# Altium PCB pcb.PcbDoc (part 2 of 2)
Units mm, origin at the board's own origin, x right, y up, seen from the top; angles counter-clockwise.
Board outline 220 x 120 mm, 8 copper layers (Top Layer, Internal 1, Internal 2, Internal 3, Internal 4, Internal 5, Internal 6, Bottom Layer), stack 1.684 mm thick; 227 components, 231 nets, 1122 pads, 16 vias.
Unrouted connection lines stored in the file: 734.
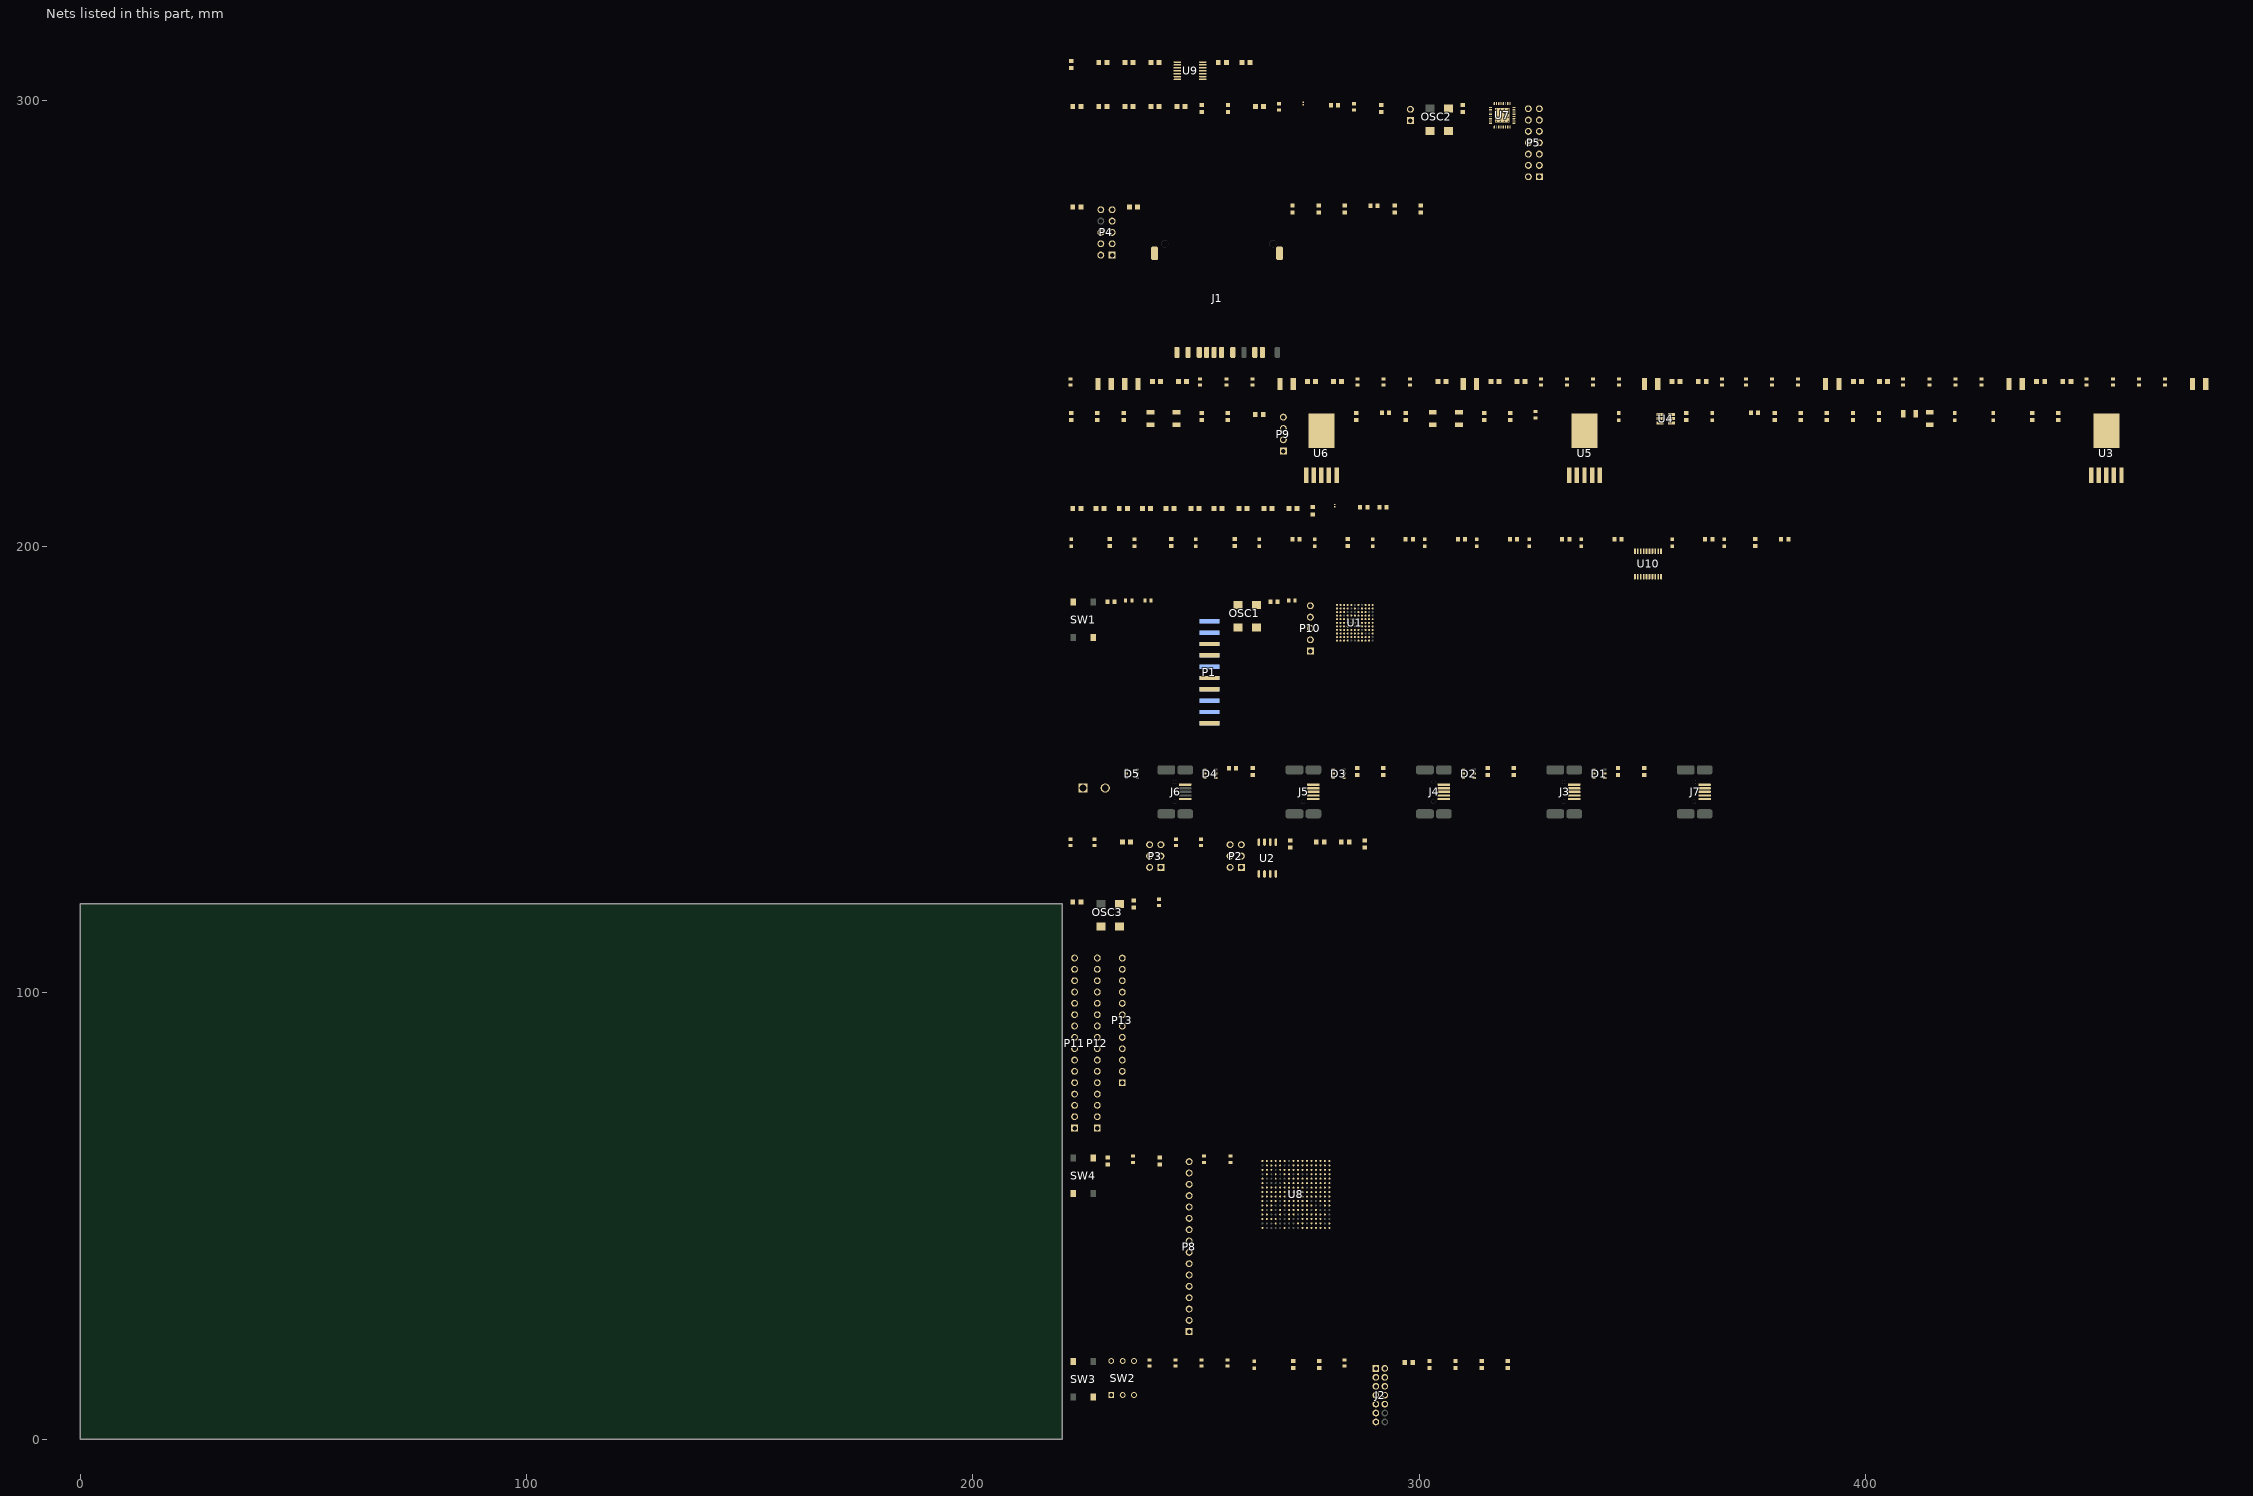
[diagram p2: the nets of this part, all layers, seen from the top]

## Part data
C1 C30 C41: library part CMP-1035-02309-1, "CAP 10nF 16V ±1% 0603 (1608 Metric) Thickness 1mm SMD"
C2 C31 C42: library part CMP-1035-00665-1, "CAP 15pF 16V ±0.25pF 0603 (1608 Metric) Thickness 1mm SMD"
C3: library part CMP-1035-02737-1, "CAP 1uF 16V ±10% 0603 (1608 Metric) Thickness 1mm SMD"
C4 C21 C29 C87 C88 C89: library part CMP-1035-02736-1, "CAP 1uF 16V ±5% 0603 (1608 Metric) Thickness 1mm SMD"
C5 C33 C34: library part CMP-1035-02788-1, "CAP 4.7uF 16V ±10% 0603 (1608 Metric) Thickness 1mm SMD"
C6 C7 C8 C9 C10 C11 C12 C13 C14 C15 C17 C28 C32 C35 C36 C37 C38 C39 C40 C72: library part CMP-1035-02583-1, "CAP 100nF 16V ±5% 0603 (1608 Metric) Thickness 1mm SMD"
C16: library part CMP-1035-02799-1, "CAP 10uF 10V ±10% 0603 (1608 Metric) Thickness 1mm SMD"
C18 C22 C25: library part CMP-1035-02762-1, "CAP 2.2uF 16V ±10% 0603 (1608 Metric) Thickness 0.55mm SMD"
C19 C20 C23 C24 C26 C27: library part CMP-1037-05006-1, "CAP 100uF 10V ±20% 1206 (3216 Metric) Thickness 1.9mm SMD"
C43 C44 C51 C58 C65 C73 C79 C86: "1210 100uF capacitor for artix-7 power decoupling"
C45 C46 C52 C53 C59 C60 C66 C67 C74 C75 C80 C81: library part CMP-1035-02785-1, "CAP 4.7uF 10V ±10% 0603 (1608 Metric) Thickness 1mm SMD"
C47 C48 C49 C50 C54 C55 C56 C57 C61 C62 C63 C64 C68 C69 C70 C71 C76 C77 C78 C82 C83 C84 C85: library part CMP-1035-02695-1, "CAP 470nF 10V ±5% 0603 (1608 Metric) Thickness 1mm SMD"
D1 D2 D3 D4 D5: "4 channel USB ESD protection device"
J1: library part CMP-0408-00001-2, "Secure Digital Card Socket"
J2: "2 x 7 2mm pitch vertical header"
J3 J4 J5 J6 J7: library part CMP-0411-00002-1, "USB, MINI, SMD, RA KME04-USBMU03A01"
LED1 LED2 LED3 LED4 LED5 LED6 LED7 LED8 LED9 LED10 LED11 LED12 LED13 LED14 LED15 LED16 LED17: library part CMP-1426-00001-1, "SMD mono-color Chip LED, WL-SMCW, Red"
nt0 nt1: "used to connect nets without transferring net name"
P1: library part CMP-0605-00003-2, "Box Header, Pitch 2.54 mm, 2x10 Position, Height 9 mm, Tail Length 3 mm"
P2 P3: library part CMP-1024-00335-1, "0.025\" SQ Post Header, Through-hole, Vertical, -55 to 105 degC, 2.54 mm Pitch, 6-Pin, Male, RoHS"
P4: library part CMP-1024-00361-1
P5: library part CMP-1024-00062-1
P6: library part CMP-1024-00330-1, "0.025\" SQ Post Header, Through-hole, Vertical, -55 to 125 degC, 2.54 mm Pitch, 2-Pin, Male, RoHS"
P7: library part CMP-0617-00009-1, "Socket, Screw Terminal Block, 2 Way, 5.0 mm Pitch, 90 Degree Angle, Through-Hole"
P8: library part CMP-1024-00437-1, "0.025\" SQ Post Header, Through-hole, Vertical, -55 to 125 degC, 2.54 mm Pitch, 16-Pin, Male, RoHS"
P9: library part CMP-1024-00357-1, "0.025\" SQ Post Header, Through-hole, Vertical, -55 to 125 degC, 2.54 mm Pitch, 4-Pin, Male, RoHS"
P10: library part CMP-1024-00364-1, "0.025\" SQ Post Header, Through-hole, Vertical, -55 to 105 degC, 2.54 mm Pitch, 5-Pin, Male, RoHS"
P11 P12: library part CMP-1024-00094-1
P13: library part CMP-1024-00087-1
R1 R2: library part CMP-1012-00030-1, "15R 0.1W 5% 0603 (1608 Metric)  SMD"
R3 R4 R5 R6 R7 R8 R9 R10 R11 R12 R13 R14 R25 R26 R27 R72: library part CMP-1012-00066-1, "470R 0.1W 5% 0603 (1608 Metric)  SMD"
R15 R32 R75: library part CMP-1012-00090-1, "4K7 0.1W 5% 0603 (1608 Metric)  SMD"
R16 R17: library part CMP-1012-00080-1, "1K8 0.1W 5% 0603 (1608 Metric)  SMD"
R18 R19 R20 R21 R57: library part CMP-1012-00050-1, "100R 0.1W 5% 0603 (1608 Metric)  SMD"
R22 R24 R28 R31 R33 R36: library part CMP-1012-00623-1, "10K 0.1W 1% 0603 (1608 Metric)  SMD"
R23: library part CMP-1012-00697-1, "45K3 0.1W 1% 0603 (1608 Metric)  SMD"
R29: library part CMP-1012-00655-1, "20K 0.1W 1% 0603 (1608 Metric)  SMD"
R30 R35 R37 R47 R48 R49 R50: library part CMP-1012-00098-1, "10K 0.1W 5% 0603 (1608 Metric)  SMD"
R34: library part CMP-1012-00603-1, "6K65 0.1W 1% 0603 (1608 Metric)  SMD"
R38 R39 R40 R41 R42: library part CMP-1012-00736-1, "100K 0.1W 1% 0603 (1608 Metric)  SMD"
R43 R52 R53 R73: library part CMP-1012-00586-1, "4K7 0.1W 1% 0603 (1608 Metric)  SMD"
R44: library part CMP-1012-00788-1, "300K 0.1W 1% 0603 (1608 Metric)  SMD"
R45: library part CMP-1012-00072-1, "820R 0.1W 5% 0603 (1608 Metric)  SMD"
R46: library part CMP-1012-00631-1, "12K 0.1W 1% 0603 (1608 Metric)  SMD"
R51 R74: library part CMP-1012-00057-1, "200R 0.1W 5% 0603 (1608 Metric)  SMD"
R54 R55 R56 R58 R59: library part CMP-1012-00074-1, "1K 0.1W 5% 0603 (1608 Metric)  SMD"
R60 R61 R63 R64: library part CMP-1012-00038-1, "33R 0.1W 5% 0603 (1608 Metric)  SMD"
R62 R65: library part CMP-1012-00518-1, "1K2 0.1W 1% 0603 (1608 Metric)  SMD"
R66 R67 R68 R69 R70 R71 R76 R77: library part CMP-1012-00001-1, "Jumper 0603 (1608 Metric)"
SW1 SW3 SW4: library part CMP-1677-00001-3, "Sealed Tactile Switch, SPST-NO, 3 to 24 V, -25 to 70 degC, 4-Pin SMD, RoHS, Bulk"
SW2: library part CMP-1440-00003-1, "WS-DITV 2.54 mm small compact THT Dip Switch with raised actuator"
U1: library part CMP-0270-00024-1, "EFM32 Giant Gecko, M3 ARM Cortex CPU, 1024 KB Flash, 128 KB RAM, 1.85 - 3.8 V Supply, 48 MHz Max Speed, -40 to 85 degC, 112-Pin BGA, RoHS Compliant"
U2: library part CMP-0357-00158-1, "128 Mb (x1/x2/x4) Serial NOR Flash Memory with Multi I/O, 108 MHz, 2.7 to 3.6 V, 8-pin SO8 Wide (SE), Tray"
U3 U5 U6: library part CMP-0062-00232-2, "3A FlexCap Low Dropout Linear Regulator for 2.7V to 5.5V Inputs, 5-pin TO-263 Thin, Pb-Free"
U4: library part CMP-0360-00441-2, "Micropower, Low Voltage, Comparator with 400 mV Reference, 2 Channels, 1.4 to 36 V, -40 to +85 degC, 6-pin TSOT-23 (S6), Tape and Reel"
U7: library part CMP-0186-00339-1, "Hi-Speed USB Host, Device or OTG PHY with ULPI Low Pin Interface, 5 pF, -40 to 85 degC, 32-Pin QFN (QFN-3304), RoHS, Tape and Reel"
U8: library part CMP-0383-00025-1, "Artix-7 FPGA, 170 User I/Os, 0 GTP, 256-Ball BGA, Speed Grade 2, Industrial Grade, Pb-Free"
U9: library part CMP-0309-00089-1, "Advanced USB Transceiver, Full Speed, Single, +/-15 KV, -40 to 85 degC, 14-Pin TSSOP (PW)"
U10: library part CMP-1615-01132-2, "Octal Buffers And Line Drivers With 3-State Outputs, PW0020A, LARGE T&R"

## Via types
v1: diameter 0.5, hole 0.3, Top Layer to Bottom Layer, 16 vias

## Nets (pads, with @x,y where several pads share a name; then routed paths per layer and width w, separated by ;. In a path a pad name is that pad's centre, name@x,y a point inside that pad or via, vN(x,y) a via of type N, cw(c..) or ccw(c..) an arc to the next point about the centre after c; other vN are vias at no path point)
0V: C1.1 C2.1 C3.2 C4.1 C5.1 C6.1 C7.1 C8.1 C9.1 C10.1 C11.1 C12.1 C13.1 C14.1 C15.1 C16.1 C17.1 C18.1 C19.1 C20.1 C21.1 C22.1 C23.1 C24.1 C25.1 C26.1 C27.1 C28.1 C29.1 C30.1 C31.1 C32.1 C33.1 C34.1 C35.1 C36.1 C37.1 C38.1 C39.1 C40.1 C41.1 C42.1 C43.1 C44.1 C45.1 C46.1 C47.1 C48.1 C49.1 C50.1 C51.1 C52.1 C53.1 C54.1 C55.1 C56.1 C57.1 C58.1 C59.1 C60.1 C61.1 C62.1 C63.1 C64.1 C65.1 C66.1 C67.1 C68.1 C69.1 C70.1 C71.1 C72.1 C73.1 C74.1 C75.1 C76.1 C77.1 C78.1 C79.1 C80.1 C81.1 C82.1 C83.1 C84.1 C85.1 C86.1 C87.1 C88.1 C89.1 D5.2 J1.3 J1.GND1 J1.GND2 J2.1 J2.3 J2.5 J2.7 J2.9 J2.11 J2.13 J6.5 nt0.1 nt1.1 OSC1.2 OSC2.2 OSC3.2 P1.2 P1.4 P1.6 P1.8 P1.10 P1.12 P1.14 P1.16 P1.18 P1.20 P4.9 P5.14 P7.2 P9.1 P13.11 P13.12 R3.2 R4.2 R5.2 R6.2 R7.2 R8.2 R9.2 R10.2 R11.2 R12.2 R13.2 R14.2 R24.1 R25.1 R31.1 R32.1 R36.1 R37.1 R44.1 R46.2 R57.1 R59.2 R72.1 SW1.3 SW2.1 SW2.2 SW2.3 SW3.3 SW4.1 U1.C7 U1.D4 U1.F9 U1.G3 U1.G9 U1.H6 U1.K4 U1.K7 U1.K10 U1.L7 U2.4 U3.3 U3.6 U4.2 U5.3 U5.6 U6.3 U6.6 U7.1 U7.2 U7.33 U8.A1 U8.A11 U8.B8 U8.C5 U8.C15 U8.D2 U8.D12 U8.E9 U8.F6 U8.F8 U8.F10 U8.F16 U8.G3 U8.G7 U8.G9 U8.G13 U8.H6 U8.H7 U8.H8 U8.J7 U8.J8 U8.J9 U8.J11 U8.K4 U8.K6 U8.K7 U8.K8 U8.K14 U8.L1 U8.L11 U8.M8 U8.N5 U8.N15 U8.P2 U8.P12 U8.R9 U8.T6 U8.T16 U9.7 U10.1 U10.10 U10.19
  other v1: 317.225,295.272 318.125,295.272 319.025,295.272 319.925,295.272 317.225,296.172 318.125,296.172 319.025,296.172 319.925,296.172 317.225,297.072 318.125,297.072 319.025,297.072 319.925,297.072 317.225,297.972 318.125,297.972 319.025,297.972 319.925,297.972
1V: C27.2 C73.2 C74.2 C75.2 C76.2 C77.2 C78.2 C85.2 C86.2 P9.2 R34.2 R35.2 U6.4 U8.E10 U8.F7 U8.F9 U8.F11 U8.G6 U8.H9 U8.J6 U8.K9 U8.L8
1V8: C24.2 C72.2 C79.2 C80.2 C81.2 C82.2 C83.2 C84.2 P9.3 R29.2 R30.2 U5.4 U8.G8 U8.G10 U8.J10 U8.K11 U8.L10
3V3: C1.2 C6.2 C7.2 C8.2 C9.2 C10.2 C11.2 C12.2 C13.2 C14.2 C15.2 C16.2 C17.2 C20.2 C28.2 C30.2 C36.2 C37.2 C38.2 C39.2 C40.2 C41.2 C43.2 C44.2 C45.2 C46.2 C47.2 C48.2 C49.2 C50.2 C51.2 C52.2 C53.2 C54.2 C55.2 C56.2 C57.2 C58.2 C59.2 C60.2 C61.2 C62.2 C63.2 C64.2 C65.2 C66.2 C67.2 C68.2 C69.2 C70.2 C71.2 C87.2 C88.2 J1.4 J2.2 LED13.2 OSC1.1 OSC1.4 OSC2.4 OSC3.4 P1.1 P4.10 P9.4 R15.2 R16.2 R17.2 R23.2 R38.2 R39.2 R40.2 R41.2 R42.2 R43.2 R47.2 R48.2 R49.2 R50.2 R51.1 R52.1 R53.1 R54.2 R55.2 R56.2 R58.1 R73.2 R75.2 U1.D5 U1.D7 U1.F8 U1.G4 U1.G8 U1.H7 U1.K8 U1.K9 U1.L4 U1.L10 U2.8 U3.4 U7.6 U7.16 U7.25 U7.30 U7.31 U8.A6 U8.A16 U8.B3 U8.B13 U8.C10 U8.D7 U8.E4 U8.E7 U8.E14 U8.F1 U8.H15 U8.J2 U8.J12 U8.L6 U8.L16 U8.M3 U8.M13 U8.N10 U8.P7 U8.R4 U8.R14 U8.T1 U8.T11 U9.1 U9.12 U9.14 U10.20
5V_USB: C18.2 C19.2 C21.2 C22.2 C23.2 C25.2 C26.2 D5.5 J6.1 LED14.2 LED15.2 LED17.2 P7.1 R22.2 R28.2 R33.2 U3.2 U4.5 U5.2 U6.2
A16: U1.E4
A17: U1.F1
A18: U1.F2
A19: U1.F3
A20: U1.F4
A21: U1.G1
A22: U1.G2
CONFIG_QSPI.QSPI_CS: P3.5 U8.L12
CONFIG_QSPI.QSPI_D0: R18.2 U8.J13
CONFIG_QSPI.QSPI_D1: R19.2 U8.J14
CONFIG_QSPI.QSPI_D2: R21.2 U8.K15
CONFIG_QSPI.QSPI_D3: R20.2 U8.K16
CONFIG_QSPI.QSPI_SCK: P2.6 U8.E8
EBI.A0: P11.1 U1.J4 U8.D9
EBI.A1: P11.2 U1.K3 U8.A13
EBI.A2: P11.3 U1.L3 U8.A14
EBI.A3: P11.4 U1.J7 U8.C14
EBI.A4: P11.5 U1.J8 U8.B14
EBI.A5: P11.6 U1.G10 U8.B15
EBI.A6: P11.7 U1.G11 U8.A15
EBI.A7: P11.8 U1.E9 U8.C16
EBI.A8: P11.9 U1.E10 U8.B16
EBI.A9: P11.10 U1.F10 U8.C11
EBI.A10: P11.11 U1.E11 U8.C12
EBI.A11: P11.12 U1.A9 U8.D13
EBI.A12: P11.13 U1.B9 U8.C13
EBI.A13: P11.14 U1.C9 U8.E12
EBI.A14: P11.15 U1.D9 U8.E13
EBI.A15: P11.16 U1.D10 U8.E11
EBI.CS0: U1.D6 U8.J15
EBI.CS1: U1.A5 U8.J16
EBI.D0: P12.1 U1.B4 U8.D14
EBI.D1: P12.2 U1.A4 U8.D15
EBI.D2: P12.3 U1.C3 U8.F12
EBI.D3: P12.4 U1.B3 U8.F13
EBI.D4: P12.5 U1.A3 U8.E16
EBI.D5: P12.6 U1.B2 U8.D16
EBI.D6: P12.7 U1.A2 U8.F15
EBI.D7: P12.8 U1.A1 U8.E15
EBI.D8: P12.9 U1.B1 U8.H11
EBI.D9: P12.10 U1.C2 U8.G12
EBI.D10: P12.11 U1.C1 U8.H12
EBI.D11: P12.12 U1.D2 U8.H13
EBI.D12: P12.13 U1.D1 U8.G14
EBI.D13: P12.14 U1.E3 U8.F14
EBI.D14: P12.15 U1.E2 U8.H16
EBI.D15: P12.16 U1.E1 U8.G16
EBI.REN: U1.A7 U8.H14
EBI.WEN: U1.B6 U8.G15
EFM32_EP1: P10.1 U1.H4
EFM32_EP2: P10.2 U1.H5
EFM32_EP3: P10.3 U1.J5
EFM32_EP4: P10.4 U1.J6
EFM32_EP5: P10.5 U1.K5
HFXTAL_N: C2.2 OSC1.3@263.563,181.848 U1.L9
HFXTAL_P: U1.L8
MCU_BRIDGE.B0: P13.10 U1.H1 U8.C8
MCU_BRIDGE.B1: P13.9 U1.J1 U8.C9
MCU_BRIDGE.B2: P13.8 U1.H2 U8.A8
MCU_BRIDGE.B3: P13.7 U1.J2 U8.A9
MCU_BRIDGE.B4: P13.6 U1.K2 U8.B9
MCU_BRIDGE.B5: P13.5 U1.L2 U8.A10
MCU_BRIDGE.B6: P13.4 U1.K1 U8.B10
MCU_BRIDGE.B7: P13.3 U1.L1 U8.B11
MCU_BRIDGE.B8: P13.2 U1.H3 U8.B12
MCU_BRIDGE.B9: P13.1 U1.J3 U8.A12
NetC3_1: C3.1 U1.F11
NetC4_2: C4.2 U1.B11
NetC5_2: C5.2 R66.2 U1.B8 U1.B10
NetC29_2: C29.2 P6.1 R68.2
NetC31_2: C31.2 OSC2.3@306.59,293.078 U7.28
NetC42_2: C42.2 OSC3.3@232.886,114.844 U8.D4
NetC89_2: C89.2 R73.1 R74.2 U8.T10
NetD1_1: D1.1 J7.2
NetD1_2: D1.2 J7.5 R77.1
NetD1_3: D1.3 J7.3
NetD1_4: D1.4 J7.4
NetD1_5: D1.5 J7.1 R76.1
NetD2_1: D2.1 J3.2 R1.2
NetD2_2: D2.2 J3.5 R67.1
NetD2_3: D2.3 J3.3 R2.2
NetD2_4: D2.4 J3.4
NetD2_5: D2.5 J3.1 R66.1
NetD3_2: D3.2 J4.5 R69.1
NetD3_4: D3.4 J4.4
NetD3_5: D3.5 J4.1 R68.1
NetD4_1: D4.1 J5.2 R60.1 R63.1
NetD4_2: D4.2 J5.5 R71.1
NetD4_3: D4.3 J5.3 R61.1 R62.1 R64.1
NetD4_4: D4.4 J5.4
NetD4_5: D4.5 J5.1 R70.1
NetJ1_1: J1.1 P4.4 R42.1 R44.2 U8.M5
NetJ1_2: J1.2 P4.6 R38.1 U8.N2
NetJ1_5: J1.5 P4.7 U8.N1
NetJ1_7: J1.7 P4.1 R39.1 U8.P1
NetJ1_8: J1.8 P4.2 R40.1 U8.P4
NetJ1_9: J1.9 P4.3 R41.1 U8.P3
NetJ1_CD: J1.CD P4.5 R43.1 U8.M1
NetLED1_1: LED1.1 R3.1
NetLED1_2: LED1.2 U10.18
NetLED2_1: LED2.1 R4.1
NetLED2_2: LED2.2 U10.16
NetLED3_1: LED3.1 R5.1
NetLED3_2: LED3.2 U10.14
NetLED4_1: LED4.1 R6.1
NetLED4_2: LED4.2 U10.12
NetLED5_1: LED5.1 R7.1
NetLED5_2: LED5.2 U10.9
NetLED6_1: LED6.1 R8.1
NetLED6_2: LED6.2 U10.7
NetLED7_1: LED7.1 R9.1
NetLED7_2: LED7.2 U10.5
NetLED8_1: LED8.1 R10.1
NetLED8_2: LED8.2 U10.3
NetLED9_1: LED9.1 R11.1
NetLED9_2: LED9.2 U1.J11
NetLED10_1: LED10.1 R12.1
NetLED10_2: LED10.2 U1.H9
NetLED11_1: LED11.1 R13.1
NetLED11_2: LED11.2 U1.H10
NetLED12_1: LED12.1 R14.1
NetLED12_2: LED12.2 U1.H11
NetLED13_1: LED13.1 R25.2
NetLED14_1: LED14.1 R26.1
NetLED15_1: LED15.1 R27.1
NetLED16_1: LED16.1 R57.2
NetLED16_2: LED16.2 R51.2 U8.H10
NetLED17_1: LED17.1 R72.2
Netnt0_0: nt0.0 R69.2
Netnt1_0: nt1.0 R67.2
NetP1_15: P1.15 SW1.2 U1.K6
NetP2_1: P2.1 R75.1 U2.2
NetP2_2: P2.2 R19.1
NetP2_3: P2.3 U2.5
NetP2_4: P2.4 R18.1
NetP2_5: P2.5 U2.6
NetP3_1: P3.1 R20.1
NetP3_2: P3.2 R17.1 U2.7
NetP3_3: P3.3 R21.1
NetP3_4: P3.4 R16.1 U2.3
NetP3_6: P3.6 R15.1 U2.1
NetP6_2: P6.2 R45.1
NetP8_1: P8.1 U8.R16
NetP8_2: P8.2 U8.T14
NetP8_3: P8.3 U8.T15
NetP8_4: P8.4 U8.N13
NetP8_5: P8.5 U8.P13
NetP8_6: P8.6 U8.N14
NetP8_7: P8.7 U8.P14
NetP8_8: P8.8 U8.N11
NetP8_9: P8.9 U8.N12
NetP8_10: P8.10 U8.P10
NetP8_11: P8.11 U8.P11
NetP8_12: P8.12 U8.R12
NetP8_13: P8.13 U8.T12
NetP8_14: P8.14 U8.R13
NetP8_15: P8.15 U8.T13
NetP8_16: P8.16 U8.R10
NetR22_1: R22.1 R26.2 U3.1 U4.6
NetR23_1: R23.1 R24.2 U3.5
NetR27_2: R27.2 R28.1 U4.1 U5.1
NetR29_1: R29.1 R31.2 U5.5
NetR30_1: R30.1 R32.2 U4.4
NetR33_1: R33.1 U6.1
NetR34_1: R34.1 R36.2 U6.5
NetR35_1: R35.1 R37.2 U4.3
NetR45_2: R45.2 U7.4
NetR46_1: R46.1 U7.32
NetR52_2: R52.2 U8.K10
NetR53_2: R53.2 SW3.2 U8.L9
NetR54_1: R54.1 SW2.6 U8.M9
NetR55_1: R55.1 SW2.5 U8.M10
NetR56_1: R56.1 SW2.4 U8.M11
NetR58_2: R58.2 R59.1 U8.L15
NetR60_2: R60.2 R65.1 U8.G5
NetR61_2: R61.2 U8.G4
NetR62_2: R62.2 U9.13
NetR63_2: R63.2 U9.10
NetR64_2: R64.2 U9.11
NetR65_2: R65.2 U8.E1
NetR70_2: R70.2
NetR71_2: R71.2
NetR74_1: R74.1 SW4.4
NetR76_2: R76.2
NetR77_2: R77.2
NetU8_G1: U8.G1 U9.4
NetU8_G2: U8.G2 U9.5
NetU8_H1: U8.H1 U10.2
NetU8_H2: U8.H2 U9.8
NetU8_H3: U8.H3 U10.6
NetU8_H4: U8.H4 U9.6
NetU8_H5: U8.H5 U9.3
NetU8_J1: U8.J1 U10.11
NetU8_J3: U8.J3 U10.4
NetU8_J4: U8.J4 U9.9
NetU8_J5: U8.J5 U9.2
NetU8_K1: U8.K1 U10.8
NetU8_K3: U8.K3 U10.17
NetU8_L2: U8.L2 U10.15
NetU8_L3: U8.L3 U10.13
SWCLK: P1.9 U1.E8
SWDIO: P1.7 U1.D8
SWO: P1.13 U1.C8
TCK_FPGA: J2.6 R48.1 U8.L7
TDI_FPGA: J2.10 R50.1 U8.N7
TDO_FPGA: J2.8 R49.1 U8.N8
TMS_FPGA: J2.4 R47.1 U8.M7
ULPI_BUS.CLKOUT: P5.12 U7.14 U8.A2
ULPI_BUS.D0: P5.1 U7.24 U8.B5
ULPI_BUS.D1: P5.2 U7.23 U8.A5
ULPI_BUS.D2: P5.3 U7.22 U8.A4
ULPI_BUS.D3: P5.4 U7.21 U8.B4
ULPI_BUS.D4: P5.5 U7.20 U8.A3
ULPI_BUS.D5: P5.6 U7.19 U8.C7
ULPI_BUS.D6: P5.7 U7.18 U8.C6
ULPI_BUS.D7: P5.8 U7.17 U8.D6
ULPI_BUS.DIR: P5.11 U7.12 U8.B2
ULPI_BUS.NXT: P5.10 U7.11 U8.C2
ULPI_BUS.RESET: P5.13 U7.9 U8.C1
ULPI_BUS.STP: P5.9 U7.13 U8.C3
USB2_HS.D_N: D3.1 J4.2 U7.8
USB2_HS.D_P: D3.3 J4.3 U7.7
USB3300_1V8: C32.2 C33.2 U7.15 U7.26
USB3300_A1V8: C34.2 C35.2 U7.29
USB_DM: R1.1 U1.A10
USB_DP: R2.1 U1.A11
pads on no net: D1.6 D2.6 D3.6 D4.6 D5.1 D5.3 D5.4 D5.6 J1.6 J1.MH1 J1.MH2 J1.WP J2.12 J2.14 J3.6 J3.7 J3.8 J3.9 J3.X J3.Y J4.6 J4.7 J4.8 J4.9 J4.X J4.Y J5.6 J5.7 J5.8 J5.9 J5.X J5.Y J6.2 J6.3 J6.4 J6.6 J6.7 J6.8 J6.9 J6.X J6.Y J7.6 J7.7 J7.8 J7.9 J7.X J7.Y OSC1.3@257.966,188.325 OSC2.1 OSC2.3@300.993,299.555 OSC3.1 OSC3.3@227.289,121.321 P1.3 P1.5 P1.11 P1.17 P1.19 P4.8 SW1.1 SW1.4 SW3.1 SW3.4 SW4.2 SW4.3 U1.A6 U1.A8 U1.B5 U1.B7 U1.C4 U1.C5 U1.C6 U1.C10 U1.C11 U1.D3 U1.D11 U1.E5 U1.E6 U1.E7 U1.F5 U1.F6 U1.F7 U1.G5 U1.G6 U1.G7 U1.H8 U1.J9 U1.J10 U1.K11 U1.L5 U1.L6 U1.L11 U7.3 U7.5 U7.10 U7.27 U8.A7 U8.B1 U8.B6 U8.B7 U8.C4 U8.D1 U8.D3 U8.D5 U8.D8 U8.D10 U8.D11 U8.E2 U8.E3 U8.E5 U8.E6 U8.F2 U8.F3 U8.F4 U8.F5 U8.G11 U8.K2 U8.K5 U8.K12 U8.K13 U8.L4 U8.L5 U8.L13 U8.L14 U8.M2 U8.M4 U8.M6 U8.M12 U8.M14 U8.M15 U8.M16 U8.N3 U8.N4 U8.N6 U8.N9 U8.N16 U8.P5 U8.P6 U8.P8 U8.P9 U8.P15 U8.P16 U8.R1 U8.R2 U8.R3 U8.R5 U8.R6 U8.R7 U8.R8 U8.R11 U8.R15 U8.T2 U8.T3 U8.T4 U8.T5 U8.T7 U8.T8 U8.T9

## Keep-outs
Keep-Out Layer:
  the board outline again, w0.2